# Allegro board 52.brd
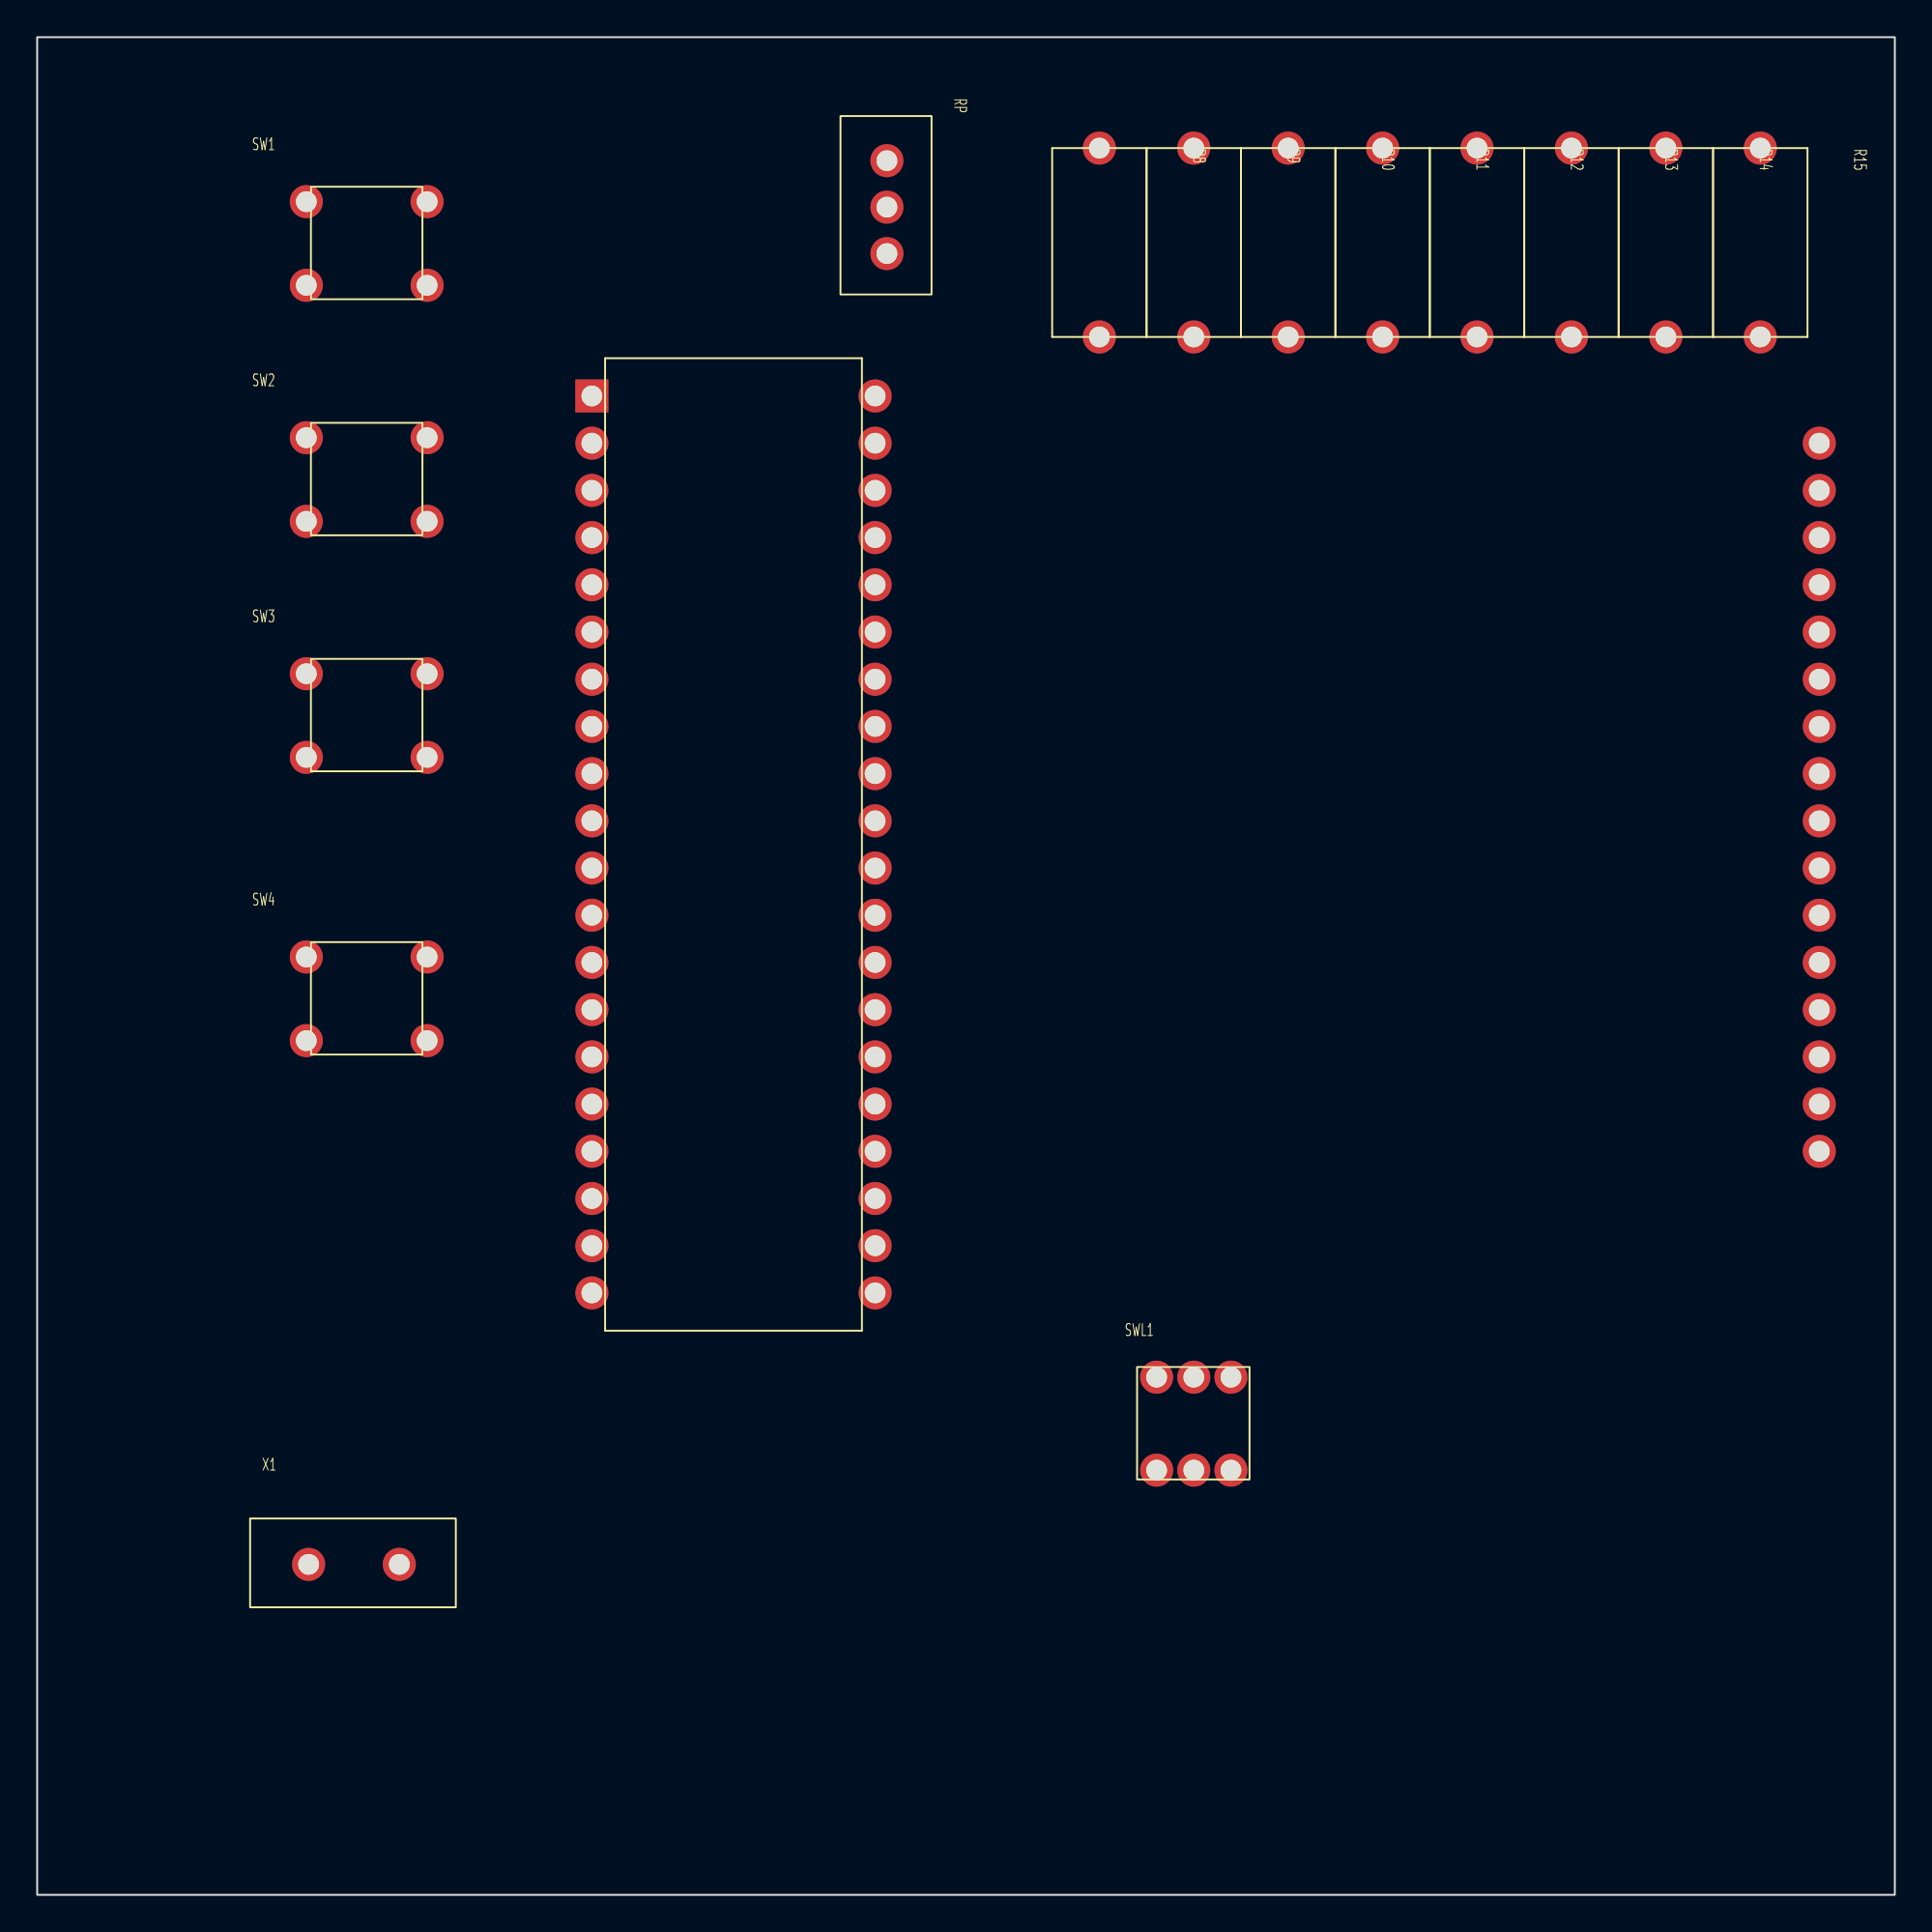
[diagram p0: board, top side]
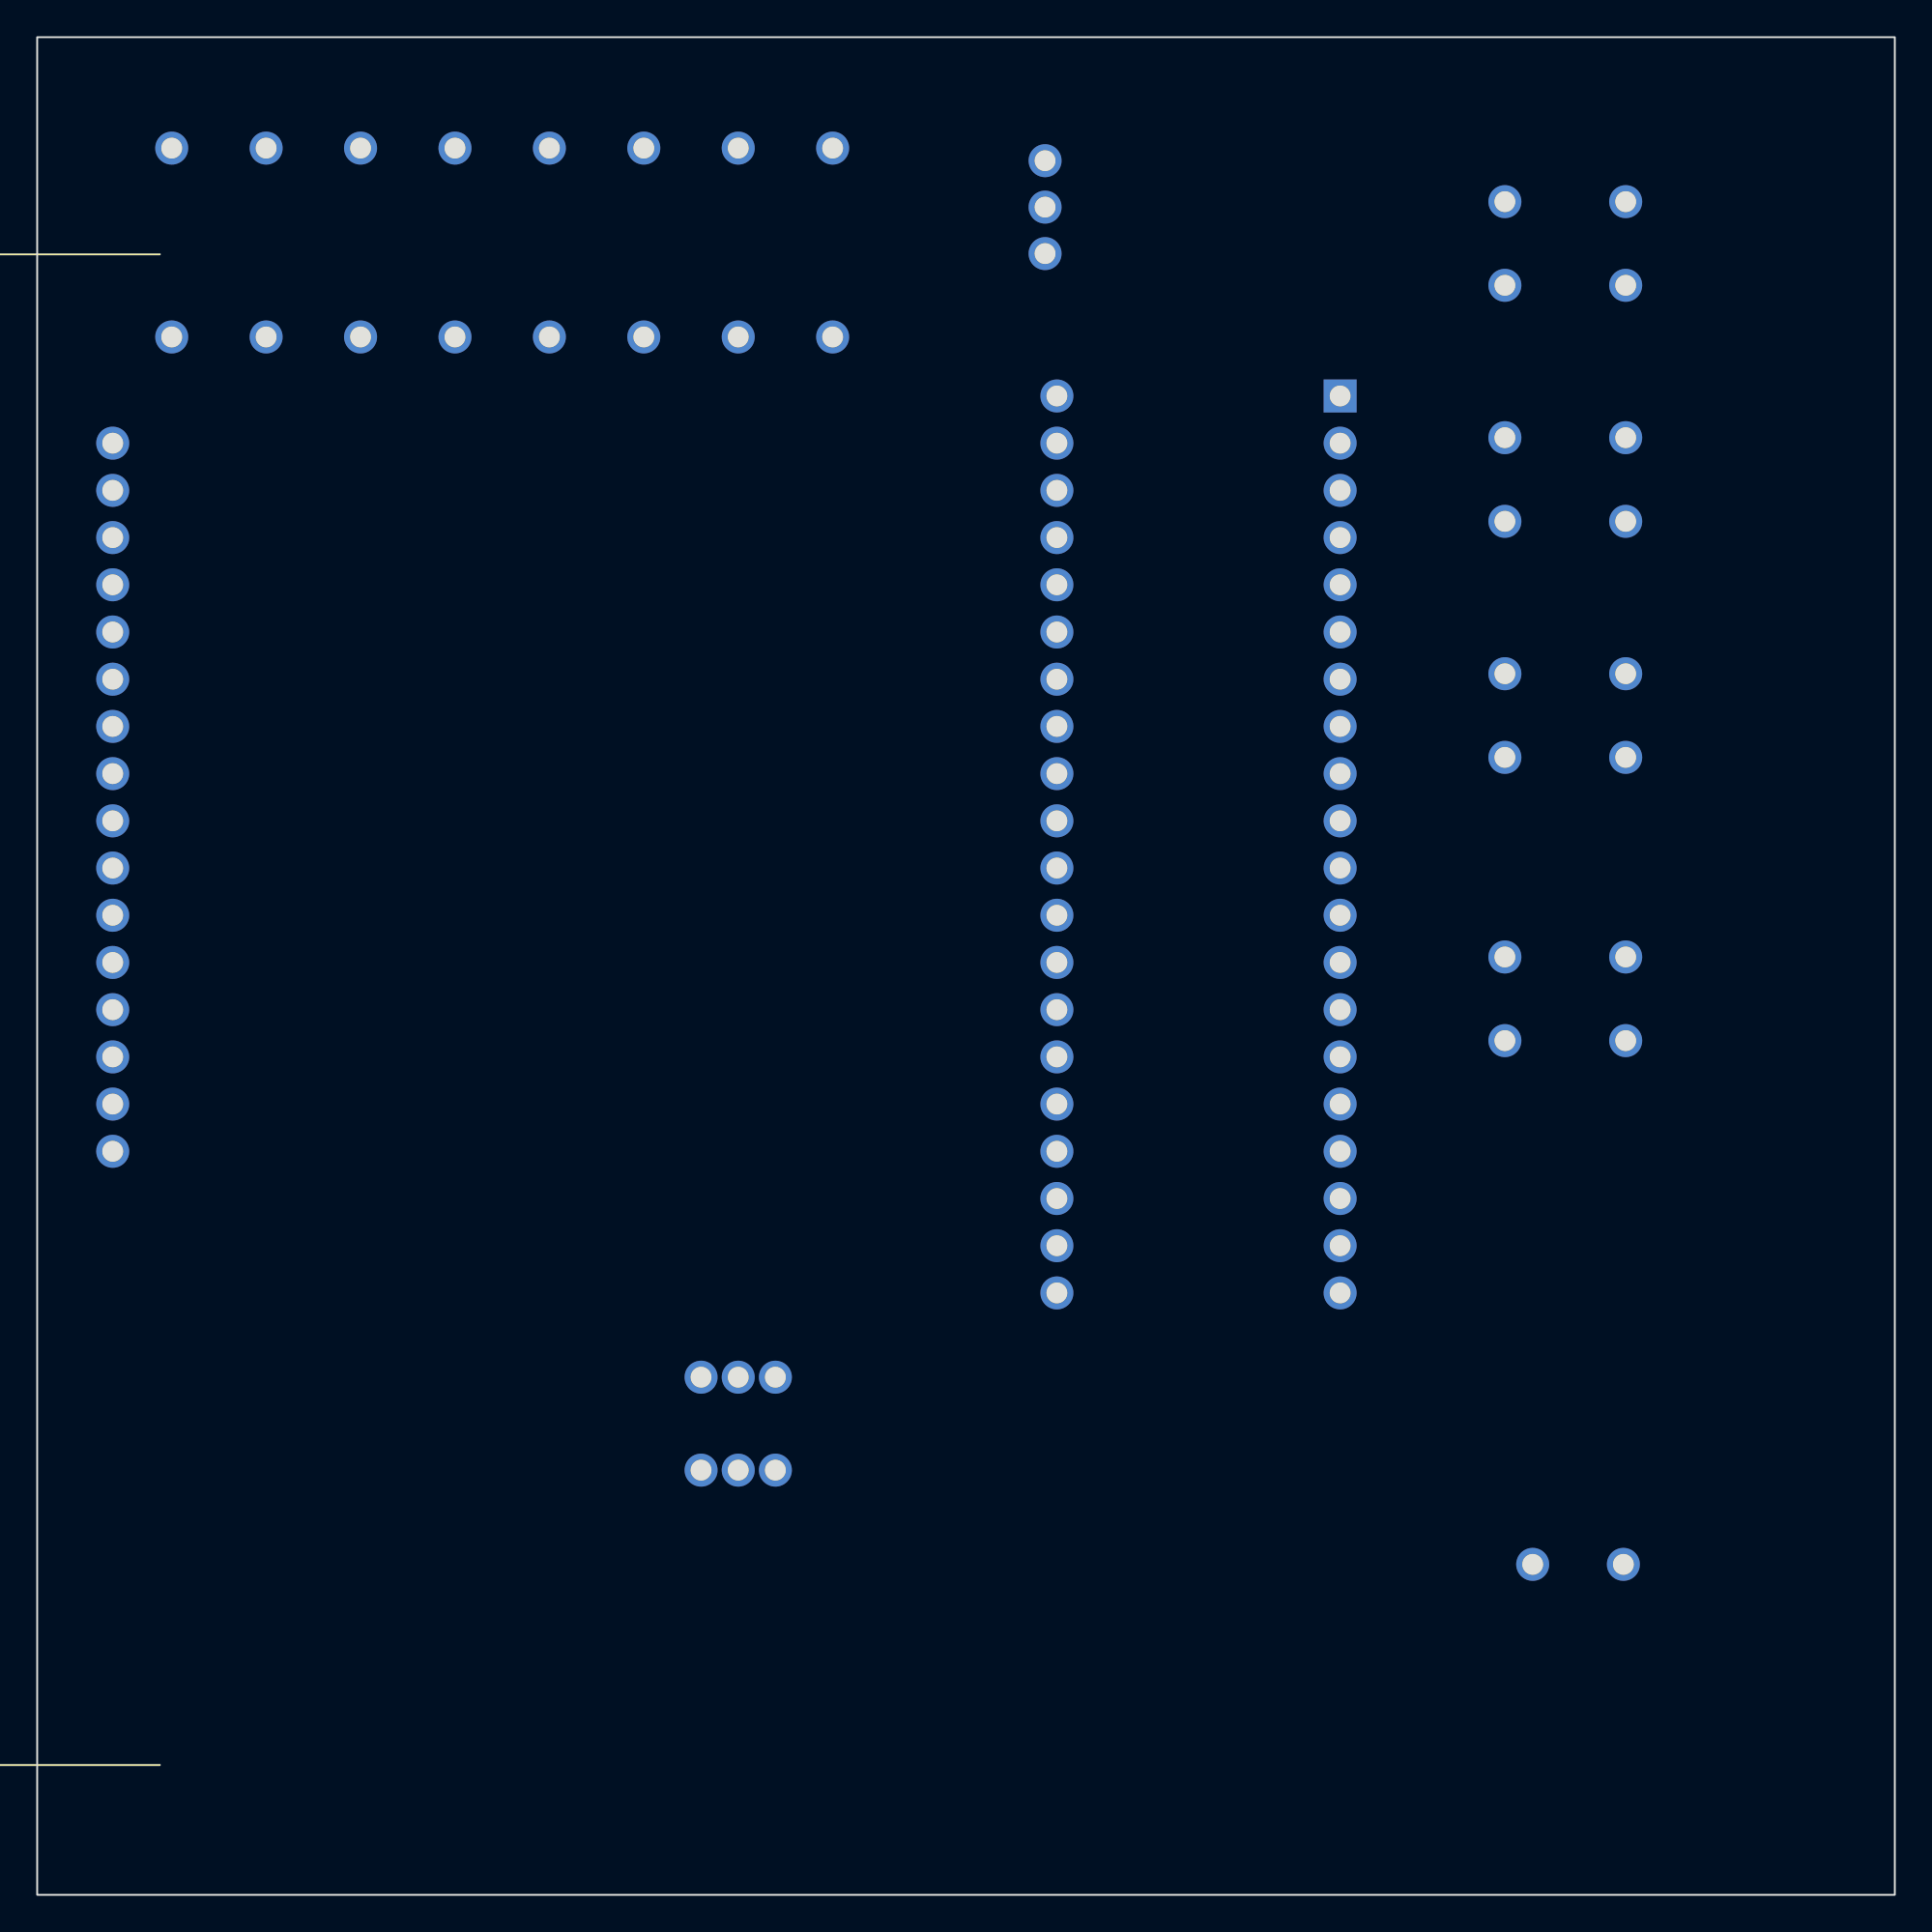
[diagram p1: board, bottom side, seen from below]

Outline 99.95 x 99.95 mm; copper layers: TOP, BOTTOM. Coordinates in mm from the lower left corner of the outline.
Outline path: rectangle 0,0 99.95,99.95

## Design rules (mm)
constraint set DEFAULT: min track width 0.127

## Placement (name value [footprint] x y rotation side)
LCD  -  [LCD1602]  98.42 60.32 270 bottom
R8  -  [RESISTOR]  57.15 88.9 270 top
R9  -  [RESISTOR]  62.23 88.9 270 top
R10  -  [RESISTOR]  67.31 88.9 270 top
R11  -  [RESISTOR]  72.39 88.9 270 top
R12  -  [RESISTOR]  77.47 88.9 270 top
R13  -  [RESISTOR]  82.55 88.9 270 top
R14  -  [RESISTOR]  87.63 88.9 270 top
R15  -  [RESISTOR]  92.71 88.9 270 top
RP  -  [POTENTIOMETER]  45.72 90.81 270 top
SW1  -  [SWITCH]  17.78 88.9 0 top
SW2  -  [SWITCH]  17.78 76.2 0 top
SW3  -  [SWITCH]  17.78 63.5 0 top
SW4  -  [SWITCH]  17.78 48.26 0 top
SWL1  -  [SWITCH_LOCK]  62.23 25.4 0 top
U1  -  [DIP-40-100-600]  37.46 56.51 0 top
X1  -  [CRYSTAL]  17.14 17.78 0 top

## Library data of the parts
LCD = LCD1602: part number: LCD1602-15020001,LCD1602
R8-R15 = RESISTOR: part number: RESISTOR-07010003,10K
RP = POTENTIOMETER: part number: POTENTIOMETER-07080001,POTENTIOMETER
SW1-SW4 = SWITCH: part number: SWITCH-16100002,SWITCH
SWL1 = SWITCH_LOCK: part number: SWITCH_LOCK-16050001,SWITCH_LOCK
U1 = STC89C52: part number: STC89C52-41020001,STC89C52
X1 = CRYSTAL: part number: CRYSTAL-12010001,12.000MHZ

## Footprints (pads in the part's own frame, mm; a bottom-side part is the same pattern mirrored in y, then rotated)
CRYSTAL
  round 1.778 hole 1.118: 1(-2.54,0) 2(2.339,0)
DIP-40-100-600
  rect 1.778x1.778 hole 1.118: 1(-7.62,24.13)
  round 1.778 hole 1.118: 2(-7.62,21.59) 3(-7.62,19.05) 4(-7.62,16.51) 5(-7.62,13.97) 6(-7.62,11.43) 7(-7.62,8.89) 8(-7.62,6.35) 9(-7.62,3.81) 10(-7.62,1.27) 11(-7.62,-1.27) 12(-7.62,-3.81) 13(-7.62,-6.35) 14(-7.62,-8.89) 15(-7.62,-11.43) 16(-7.62,-13.97) 17(-7.62,-16.51) 18(-7.62,-19.05) 19(-7.62,-21.59) 20(-7.62,-24.13) 21(7.62,-24.13) 22(7.62,-21.59) 23(7.62,-19.05) 24(7.62,-16.51) 25(7.62,-13.97) 26(7.62,-11.43) 27(7.62,-8.89) 28(7.62,-6.35) 29(7.62,-3.81) 30(7.62,-1.27) 31(7.62,1.27) 32(7.62,3.81) 33(7.62,6.35) 34(7.62,8.89) 35(7.62,11.43) 36(7.62,13.97) 37(7.62,16.51) 38(7.62,19.05) 39(7.62,21.59) 40(7.62,24.13)
LCD1602
  round 1.778 hole 1.118: 1(-17.78,2.54) 2(-15.24,2.54) 3(-12.7,2.54) 4(-10.16,2.54) 5(-7.62,2.54) 6(-5.08,2.54) 7(-2.54,2.54) 8(0,2.54) 9(2.54,2.54) 10(5.08,2.54) 11(7.62,2.54) 12(10.16,2.54) 13(12.7,2.54) 14(15.24,2.54) 15(17.78,2.54) 16(20.32,2.54)
POTENTIOMETER
  round 1.778 hole 1.118: 1(-2.499,0) 2(0,0) 3(2.499,0)
RESISTOR
  round 1.778 hole 1.118: 1(-5.08,0) 2(5.08,0)
SWITCH
  round 1.778 hole 1.118: 1(-3.299,2.2) 2(3.2,2.2) 3(-3.299,-2.301) 4(3.2,-2.301)
SWITCH_LOCK
  round 1.778 hole 1.118: 1(-1.999,2.451) 2(0,2.451) 3(1.999,2.451) 4(-1.999,-2.55) 5(0,-2.55) 6(1.999,-2.55)

## Nets
3V3: U1.7
GND: LCD.1 LCD.16 RP.1 SW2.4 SW3.4 SW4.4 U1.20
VCC: LCD.2 LCD.15 R8.1 R9.1 R10.1 R11.1 R12.1 R13.1 R14.1 R15.1 RP.3 SW1.2 U1.31 U1.40
BUZZ: U1.21
D0: LCD.7 R8.2 U1.39
D1: LCD.8 R9.2 U1.38
D2: LCD.9 R10.2 U1.37
D3: LCD.10 R11.2 U1.36
D4: LCD.11 R12.2 U1.35
D5: LCD.12 R13.2 U1.34
D6: LCD.13 R14.2 U1.33
D7: LCD.14 R15.2 U1.32
FUN: SW4.2 U1.15
LCDE: LCD.6 U1.26
LED: U1.23
RES: U1.3
RS: LCD.4 U1.28
RST: SW1.4 U1.9
RW: LCD.5 U1.27
RXD: U1.10
SA: U1.22
SCL: U1.25
SDA: U1.24
SET: SW2.2 U1.13
STA: SW3.2 U1.12
STATE: U1.8
TXD: U1.11
UNNAMED_1_CAPACITANCE_I43_1: SWL1.6
UNNAMED_1_LCD1602_I59_VL: LCD.3(VL) RP.2(WIPER)
UNNAMED_1_SOCKET2_I54_V: SWL1.5
XTAL1: U1.19 X1.2
XTAL2: U1.18(XTAL2) X1.1

Pads without a net: SW1 1 3; SW2 1 3; SW3 1 3; SW4 1 3; SWL1 1 2 3 4; U1 1 2 4 5 6 14 16 17 29 30
